# Altium PCB PCB2_layout.PcbDoc
Units mm, origin at the board's own origin, x right, y up, seen from the top; angles counter-clockwise.
Board outline 80 x 80 mm, 2 copper layers (Top Layer, Bottom Layer), stack 1.671 mm thick; 9 components, 2 nets, 53 pads, 593 vias.
Unrouted connection lines stored in the file: 7.
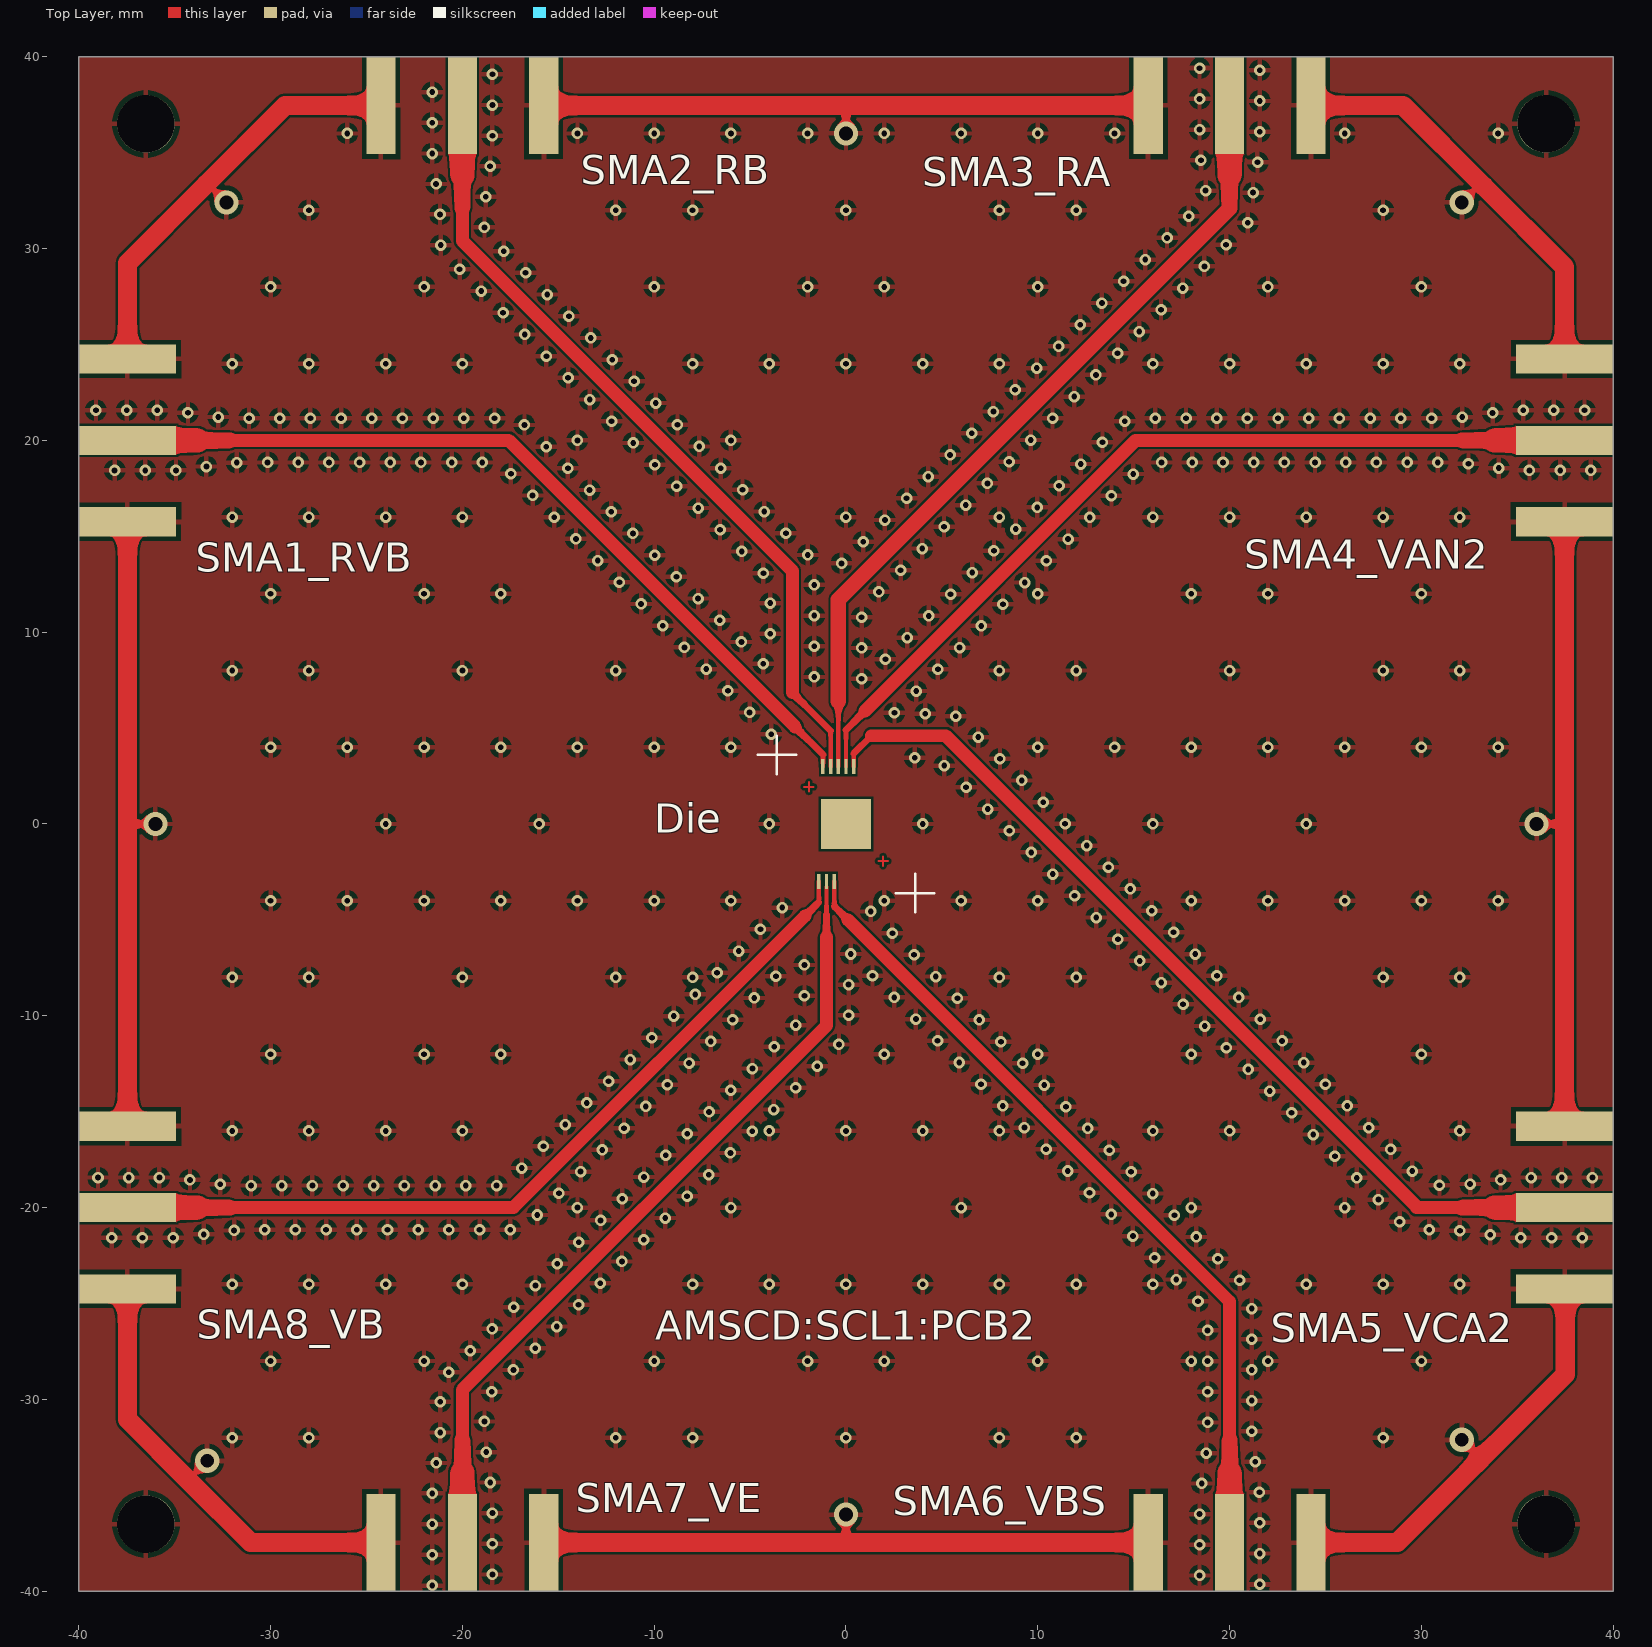
[diagram p0: Top Layer view]
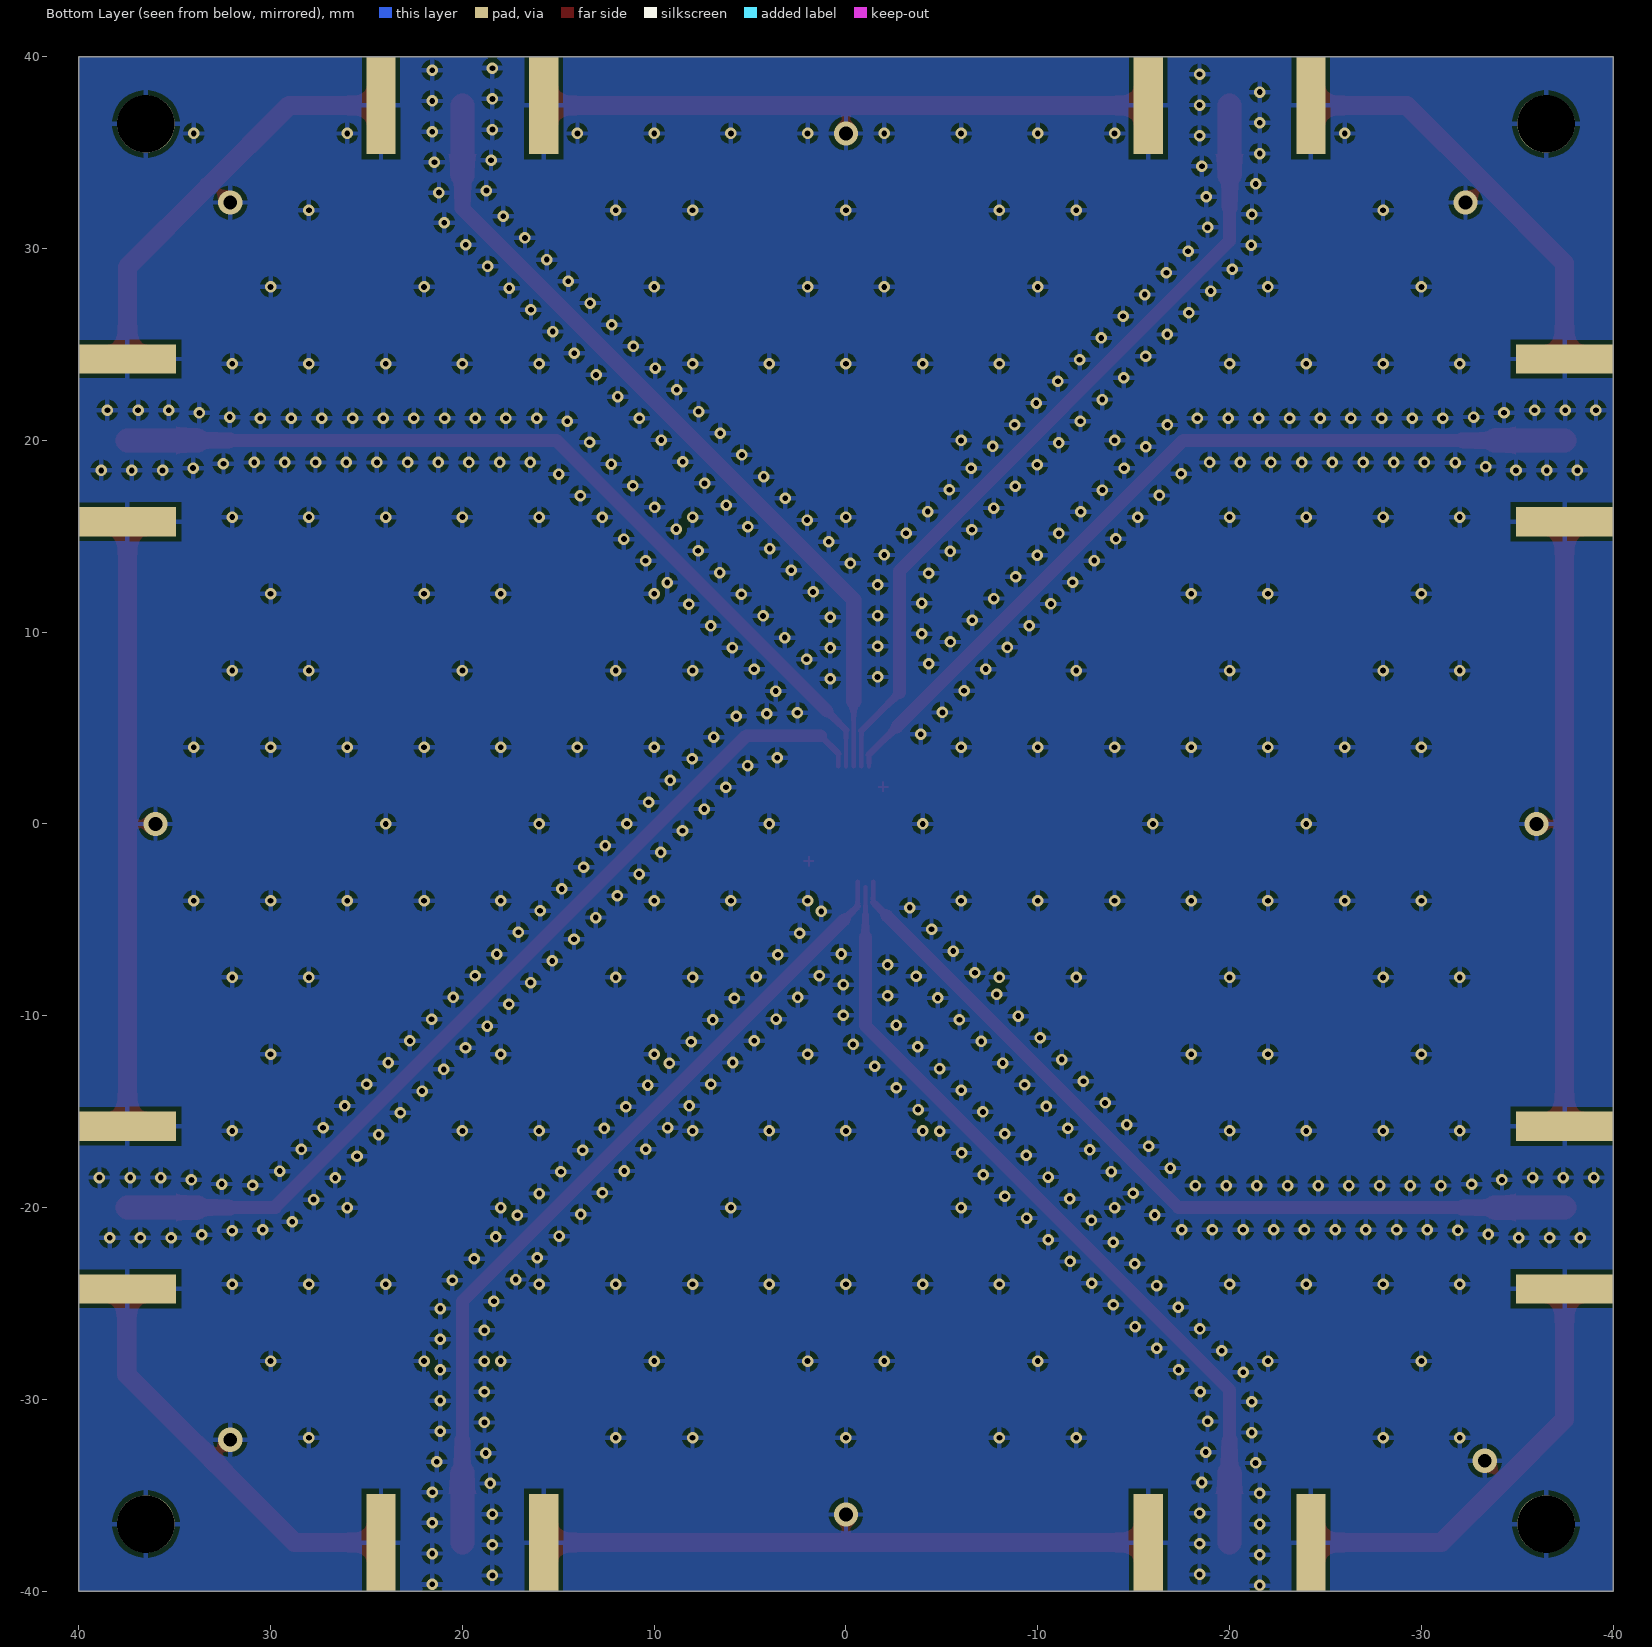
[diagram p1: Bottom Layer view, seen from below]
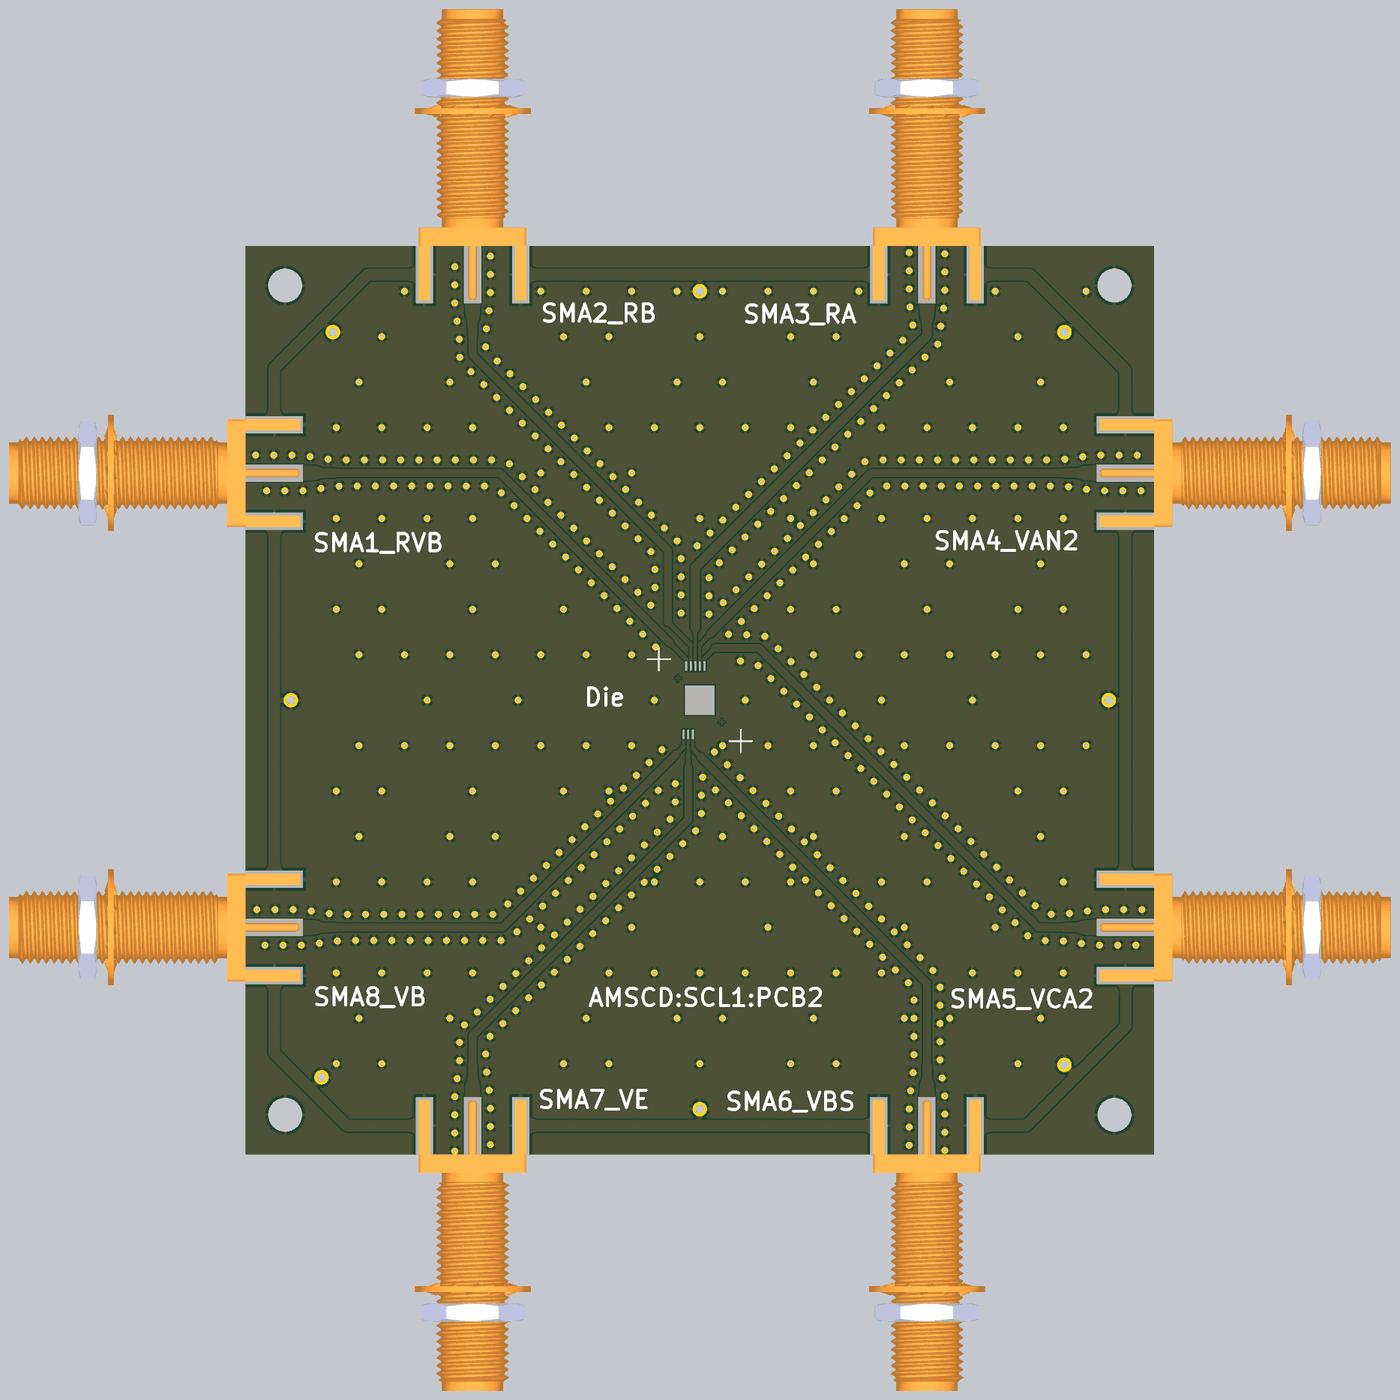
[diagram p2: 3D render of the assembled board from above, using the file's embedded part models]

## Layer stack, top to bottom
Top Solder: solder mask 0.0102, Solder Resist, Dk 3.5
Top Layer: signal copper 0.0356
Dielectric 1: dielectric 1.6, FR-4, Dk 4.5
Bottom Layer: signal copper 0.0356
Bottom Solder: solder mask 0.0102, Solder Resist, Dk 3.5

## Board outline
-40,-40 -40,40 40,40 40,-40

## Design rules (kind name [scope] priority, off if disabled: settings)
Clearance [All] p1: gap=0.127 ignorepadtopadclearanceinfootprint=FALSE except(0.1: Arc-Arc Arc-Track Track-Track)
HoleSize [All] p1: absolutevalues=TRUE maxlimit=3 minlimit=0.025 maxpercent=80.000 minpercent=20.000
MinimumSolderMaskSliver [All] p1: minsoldermaskwidth=0.05
PolygonConnect [All] p1: connectstyle=Relief reliefconductorwidth=0.254 reliefentries=4 polygonreliefangle="90 Angle" airgapwidth=0.254
RoutingVias [All] p1: holewidth=0.711 width=1.27 viastyle="Through Hole" minholewidth=0.711 minwidth=1.27 maxholewidth=0.711 maxwidth=1.27
SilkToSilkClearance [All] p1: silktosilkclearance=0.1
SilkToSolderMaskClearance [IsPad] p1: minsilkscreentomaskgap=0.1 clearancetoexposedcopper=TRUE
SolderMaskExpansion [All] p1: expansion=0 istentingtop=FALSE
UnRoutedNet [All] p1 off:
Width [All] p1: maxlimit=1.5 minlimit=0.1 preferedwidth=0.675 impedanceprofiledriven=TRUE impedanceprofileid={B1FB9A43-210C-48CF-8ADB-6F02EE692C1B} impedanceprofilevalue=50.000000 minimp=50.000000 maximp=50.000000 favimp=50.000000
25 further rules are at their usual default settings.

## Components (designator, comment, footprint, x,y, rotation, side; value= is the part's Value field where it differs from the comment)
Die "Comment" COB2_7x7 0,0 r0 top
SMA1_RVB "Comment" TE_CONSMA003.062-L-G#1 -40,20 r270 top
SMA2_RB "Comment" TE_CONSMA003.062-L-G#2 -20,40 r180 top
SMA3_RA "Comment" TE_CONSMA003.062-L-G#3 20,40 r180 top
SMA4_VAN2 "Comment" TE_CONSMA003.062-L-G#4 40,20 r90 top
SMA5_VCA2 "Comment" TE_CONSMA003.062-L-G#5 40,-20 r90 top
SMA6_VBS "Comment" TE_CONSMA003.062-L-G#6 20,-40 r0 top
SMA7_VE "Comment" TE_CONSMA003.062-L-G#7 -20,-40 r0 top
SMA8_VB "Comment" TE_CONSMA003.062-L-G#8 -40,-20 r270 top

## Footprints (in the part's own frame and the unit in brackets; to place one, negate y for a bottom-side part, rotate by r counter-clockwise, add the part's x,y. Pads: shape width x height; smd on the part's side, far side on the other; paste and mask are expansions set on the pad)
COB2_7x7 [mm]
  rect 2.6x2.6 smd: 9(0,0)
  rect 0.18x0.8 smd: SMA1_VB(-1.2,3) SMA2_RB(-0.8,3) SMA3_RA(-0.4,3) SMA4_VAN2(0,3) SMA5_VCA2(0.4,3) SMA6_VBS(-0.616,-3) SMA7_VE(-1.016,-3) SMA8_VB(-1.416,-3)
  silkscreen extent -4.6,-4.6 4.6,4.6
TE_CONSMA003.062-L-G#1 [mm]
  rect 1.52x5.08 smd far side: 4(-4.24,2.54) 5(4.24,2.54)
  rect 1.52x5.08 smd: GND(-4.24,2.54) GND(4.24,2.54) SMA1_VB(0,2.54)
  body extent -5.1,-20.8 5.1,4.8, height 5.5
TE_CONSMA003.062-L-G#2 [mm]
  rect 1.52x5.08 smd far side: 4(-4.24,2.54) 5(4.24,2.54)
  rect 1.52x5.08 smd: GND(-4.24,2.54) GND(4.24,2.54) SMA2_RB(0,2.54)
  body extent -5.1,-20.8 5.1,4.8, height 5.5
TE_CONSMA003.062-L-G#3 [mm]
  rect 1.52x5.08 smd far side: 4(-4.24,2.54) 5(4.24,2.54)
  rect 1.52x5.08 smd: GND(-4.24,2.54) GND(4.24,2.54) SMA3_RA(0,2.54)
  body extent -5.1,-20.8 5.1,4.8, height 5.5
TE_CONSMA003.062-L-G#4 [mm]
  rect 1.52x5.08 smd far side: 4(-4.24,2.54) 5(4.24,2.54)
  rect 1.52x5.08 smd: GND(-4.24,2.54) GND(4.24,2.54) SMA4_VAN2(0,2.54)
  body extent -5.1,-20.8 5.1,4.8, height 5.5
TE_CONSMA003.062-L-G#5 [mm]
  rect 1.52x5.08 smd far side: 4(-4.24,2.54) 5(4.24,2.54)
  rect 1.52x5.08 smd: GND(-4.24,2.54) GND(4.24,2.54) SMA5_VCA2(0,2.54)
  body extent -5.1,-20.8 5.1,4.8, height 5.5
TE_CONSMA003.062-L-G#6 [mm]
  rect 1.52x5.08 smd far side: 4(-4.24,2.54) 5(4.24,2.54)
  rect 1.52x5.08 smd: GND(-4.24,2.54) GND(4.24,2.54) SMA6_VBS(0,2.54)
  body extent -5.1,-20.8 5.1,4.8, height 5.5
TE_CONSMA003.062-L-G#7 [mm]
  rect 1.52x5.08 smd far side: 4(-4.24,2.54) 5(4.24,2.54)
  rect 1.52x5.08 smd: GND(-4.24,2.54) GND(4.24,2.54) SMA7_VE(0,2.54)
  body extent -5.1,-20.8 5.1,4.8, height 5.5
TE_CONSMA003.062-L-G#8 [mm]
  rect 1.52x5.08 smd far side: 4(-4.24,2.54) 5(4.24,2.54)
  rect 1.52x5.08 smd: GND(-4.24,2.54) GND(4.24,2.54) SMA8_VB(0,2.54)
  body extent -5.1,-20.8 5.1,4.8, height 5.5

## Free pads (board coordinates)
  round 3 hole 3 unplated: 2(-36.5,-36.5) 2(-36.5,36.5) 2(36.5,-36.5) 2(36.5,36.5)

## Via types
v1: diameter 0.6, hole 0.3, Top Layer to Bottom Layer, 585 vias
v2: diameter 1.27, hole 0.711, Top Layer to Bottom Layer, 8 vias

## Nets (pads, with @x,y where several pads share a name; then routed paths per layer and width w, separated by ;. In a path a pad name is that pad's centre, name@x,y a point inside that pad or via, vN(x,y) a via of type N, cw(c..) or ccw(c..) an arc to the next point about the centre after c; other vN are vias at no path point)
GND: pad.2 SMA1_RVB.4 SMA1_RVB.5 SMA1_RVB.GND SMA2_RB.4 SMA2_RB.5 SMA2_RB.GND SMA3_RA.4 SMA3_RA.5 SMA3_RA.GND SMA4_VAN2.4 SMA4_VAN2.5 SMA4_VAN2.GND SMA5_VCA2.4 SMA5_VCA2.5 SMA5_VCA2.GND SMA6_VBS.4 SMA6_VBS.5 SMA6_VBS.GND SMA7_VE.4 SMA7_VE.5 SMA7_VE.GND SMA8_VB.4 SMA8_VB.5 SMA8_VB.GND | length 224.9
  Top Layer w0.22: SMA5_VCA2.GND@37.46,-24.24 SMA5_VCA2.GND@37.5,-24.28
  Top Layer w0.254: -37.46,0 v2(-36,0) ; -34.25,-34.25 -34.25,-34.15 v2(-33.3,-33.2) ; -33.35,33.35 -33.25,33.35 v2(-32.3,32.4) ; 0,-37.46 v2(0,-36) ; v2(0,36) 0,37.46 ; v2(32.1,-32.1) 32.14,-32.1 33.12,-33.08 ; v2(32.1,32.4) 32.95,33.25 33.25,33.25 ; v2(36,0) 37.46,0
  Top Layer w1: SMA8_VB.GND@-37.46,-24.24 -37.46,-31.04 -34.25,-34.25 -31.04,-37.46 SMA7_VE.GND@-24.24,-37.46 ; SMA8_VB.GND@-37.46,-15.76 -37.46,0 SMA1_RVB.GND@-37.46,15.76 ; SMA1_RVB.GND@-37.46,24.24 -37.46,29.24 -33.35,33.35 -29.24,37.46 SMA2_RB.GND@-24.24,37.46 ; SMA7_VE.GND@-15.76,-37.46 0,-37.46 SMA6_VBS.GND@15.76,-37.46 ; SMA2_RB.GND@-15.76,37.46 0,37.46 SMA3_RA.GND@15.76,37.46 ; SMA6_VBS.GND@24.24,-37.46 28.74,-37.46 33.12,-33.08 37.5,-28.7 SMA5_VCA2.GND@37.5,-24.28 ; SMA3_RA.GND@24.24,37.46 29.04,37.46 33.25,33.25 37.46,29.04 SMA4_VAN2.GND@37.46,24.24 ; SMA5_VCA2.GND@37.46,-15.76 37.46,0 SMA4_VAN2.GND@37.46,15.76
  other v1: -21.567,-39.702 21.567,-39.637 18.433,-39.179 -18.433,-39.128 -21.567,-38.102 21.567,-38.037 18.433,-37.579 -18.433,-37.528 -21.567,-36.502 21.567,-36.437 18.433,-35.979 -18.433,-35.928 -21.564,-34.902 21.559,-34.837 18.553,-34.384 -18.545,-34.332 -21.356,-33.315 21.331,-33.253 18.781,-32.8 -18.761,-32.747 -32,-32 -28,-32 -12,-32 -8,-32 0,-32 8,-32 12,-32 28,-32 -21.151,-31.728 21.151,-31.663 18.849,-31.201 -18.849,-31.149 -21.151,-30.128 21.151,-30.063 18.849,-29.601 -18.468,-29.596 -20.716,-28.589 -17.337,-28.464 21.151,-28.463 -30,-28 -22,-28 -10,-28 -2,-28 2,-28 10,-28 18,-28 18.849,-28.001 22,-28 30,-28 -19.585,-27.457 -16.205,-27.333 21.151,-26.863 18.849,-26.401 -18.453,-26.326 -15.074,-26.201 21.151,-25.263 -17.322,-25.194 -13.942,-25.07 18.353,-24.88 -16.191,-24.063 -32,-24 -28,-24 -24,-24 -20,-24 -8,-24 -4,-24 0,-24 4,-24 8,-24 12,-24 16,-24 24,-24 28,-24 32,-24 -12.811,-23.939 20.52,-23.793 17.221,-23.749 -15.059,-22.932 -11.68,-22.807 19.389,-22.661 16.09,-22.618 -13.928,-21.8 -10.548,-21.676 -38.281,-21.567 -36.681,-21.567 -35.081,-21.567 35.186,-21.567 36.786,-21.567 38.386,-21.567 18.258,-21.53 14.959,-21.486 -33.49,-21.398 33.593,-21.419 -31.903,-21.191 32.007,-21.203 -30.303,-21.151 -28.703,-21.151 -27.103,-21.151 -25.503,-21.151 -23.903,-21.151 -22.303,-21.151 -20.703,-21.151 -19.103,-21.151 -17.503,-21.151 30.408,-21.16 28.864,-20.739 -12.797,-20.669 -9.417,-20.545 -16.098,-20.386 17.126,-20.399 13.827,-20.355 -14,-20 -6,-20 6,-20 18,-20 26,-20 27.757,-19.584 -11.665,-19.538 -8.286,-19.413 15.995,-19.267 -14.967,-19.254 12.696,-19.224 -31.019,-18.849 -29.419,-18.849 -27.819,-18.849 -26.219,-18.849 -24.619,-18.849 -23.019,-18.849 -21.419,-18.849 -19.819,-18.849 -18.219,-18.849 30.94,-18.84 -32.618,-18.784 32.539,-18.771 -34.201,-18.556 34.124,-18.556 26.625,-18.453 -38.997,-18.433 -37.397,-18.433 -35.797,-18.433 35.72,-18.433 37.32,-18.433 38.92,-18.433 -10.534,-18.406 -7.154,-18.282 -13.835,-18.123 14.864,-18.136 29.524,-18.096 11.565,-18.092 -16.905,-17.937 25.494,-17.321 -9.402,-17.275 -6.023,-17.15 13.732,-17.005 -12.704,-16.992 10.433,-16.961 28.392,-16.965 -15.773,-16.806 24.362,-16.19 -8.271,-16.144 -4.891,-16.019 -32,-16 -28,-16 -24,-16 -20,-16 -4,-16 0,-16 4,-16 8,-16 16,-16 20,-16 32,-16 -11.573,-15.86 12.601,-15.873 27.261,-15.833 9.302,-15.829 -14.642,-15.674 23.231,-15.059 -7.14,-15.012 -3.76,-14.888 11.469,-14.742 -10.441,-14.729 8.17,-14.698 26.129,-14.702 -13.511,-14.543 22.1,-13.927 -6.008,-13.881 -2.629,-13.756 -9.31,-13.598 10.338,-13.61 7.039,-13.567 24.998,-13.57 -12.379,-13.412 20.968,-12.796 -4.877,-12.749 -1.497,-12.625 9.207,-12.479 -8.179,-12.466 5.908,-12.435 23.867,-12.439 -11.248,-12.28 -30,-12 -22,-12 -18,-12 2,-12 10,-12 18,-12 30,-12 19.837,-11.665 -3.746,-11.618 -0.366,-11.494 8.075,-11.348 -7.047,-11.335 4.776,-11.304 22.735,-11.308 -10.116,-11.149 18.706,-10.533 -2.614,-10.487 -5.916,-10.203 6.944,-10.216 3.645,-10.173 21.604,-10.176 -8.985,-10.017 0.136,-9.974 17.574,-9.402 5.813,-9.085 -4.785,-9.072 2.514,-9.041 20.473,-9.045 -2.166,-8.951 -7.854,-8.886 0.136,-8.374 16.443,-8.27 -32,-8 -28,-8 -20,-8 -12,-8 -8,-8 8,-8 12,-8 28,-8 32,-8 -3.653,-7.941 4.681,-7.954 1.382,-7.91 19.341,-7.914 -6.722,-7.755 -2.166,-7.351 15.312,-7.139 3.55,-6.822 0.251,-6.778 18.21,-6.782 -5.591,-6.623 14.18,-6.008 2.418,-5.691 17.079,-5.651 -4.46,-5.492 13.049,-4.876 1.287,-4.56 15.947,-4.52 -3.328,-4.361 -30,-4 -26,-4 -22,-4 -18,-4 -14,-4 -10,-4 -6,-4 2,-4 6,-4 10,-4 18,-4 22,-4 26,-4 30,-4 34,-4 11.917,-3.745 14.816,-3.388 10.786,-2.614 13.684,-2.257 9.655,-1.482 12.553,-1.125 8.523,-0.351 -24,0 -16,0 -4,0 4,0 11.422,0.006 16,0 24,0 7.392,0.78 10.29,1.137 6.261,1.912 9.159,2.269 5.129,3.043 8.028,3.4 3.582,3.449 -30,4 -26,4 -22,4 -18,4 -14,4 -10,4 -6,4 10,4 14,4 18,4 22,4 26,4 30,4 34,4 6.896,4.531 -3.895,4.682 5.722,5.619 4.128,5.751 2.529,5.801 -5.026,5.814 -6.158,6.945 3.66,6.932 0.815,7.577 -1.649,7.664 -32,8 -28,8 -20,8 -12,8 8,8 12,8 20,8 28,8 32,8 4.791,8.064 -7.289,8.076 -4.317,8.359 2.057,8.585 0.815,9.177 -8.42,9.208 5.923,9.195 -1.649,9.264 -5.448,9.491 3.189,9.716 -3.951,9.917 7.054,10.327 -9.552,10.339 -6.58,10.622 0.815,10.777 4.32,10.848 -1.649,10.864 -10.683,11.47 8.186,11.458 -3.951,11.517 -7.711,11.754 5.451,11.979 -30,12 -22,12 -18,12 10,12 18,12 22,12 30,12 1.716,12.099 -1.649,12.464 9.317,12.589 -11.814,12.602 -8.842,12.885 -4.305,13.077 6.583,13.11 2.848,13.23 -0.234,13.584 -12.946,13.733 10.448,13.721 -9.974,14.016 -1.998,14.026 -5.436,14.209 7.714,14.242 3.979,14.361 0.898,14.716 -14.077,14.864 11.58,14.852 -11.105,15.148 -3.129,15.157 -6.568,15.34 8.845,15.373 5.111,15.493 2.029,15.847 12.711,15.983 -32,16 -28,16 -24,16 -20,16 -15.208,15.996 0,16 8,16 16,16 20,16 24,16 28,16 32,16 -12.236,16.279 -4.261,16.288 -7.699,16.471 9.977,16.504 6.242,16.624 3.161,16.979 -16.34,17.127 13.842,17.115 -13.368,17.41 -5.392,17.42 -8.83,17.603 11.108,17.636 7.373,17.755 4.292,18.11 14.974,18.246 -17.471,18.259 -38.132,18.433 -36.532,18.433 -34.932,18.433 35.633,18.433 37.233,18.433 38.833,18.433 -14.499,18.542 -6.524,18.551 34.038,18.556 -33.345,18.638 -9.962,18.734 12.24,18.767 32.455,18.785 -31.758,18.841 -30.158,18.849 -28.558,18.849 -26.958,18.849 -25.358,18.849 -23.758,18.849 -22.158,18.849 -20.558,18.849 -18.958,18.849 16.456,18.849 18.056,18.849 19.656,18.849 21.256,18.849 22.856,18.849 24.456,18.849 26.056,18.849 27.656,18.849 29.256,18.849 30.856,18.849 8.505,18.887 5.423,19.241 -15.63,19.673 -7.655,19.683 -11.093,19.866 13.371,19.899 -14,20 -6,20 9.636,20.018 6.555,20.373 -16.762,20.804 -8.786,20.814 -12.225,20.997 14.535,20.996 10.767,21.15 -31.124,21.151 -29.524,21.151 -27.924,21.151 -26.324,21.151 -24.724,21.151 -23.124,21.151 -21.524,21.151 -19.924,21.151 -18.324,21.151 16.128,21.151 17.728,21.151 19.328,21.151 20.928,21.151 22.528,21.151 24.128,21.151 25.728,21.151 27.328,21.151 28.928,21.151 30.528,21.151 -32.723,21.217 32.126,21.215 -34.306,21.444 33.711,21.433 7.686,21.504 -39.102,21.567 -37.502,21.567 -35.902,21.567 35.306,21.567 36.906,21.567 38.506,21.567 -9.918,21.945 -13.356,22.128 11.899,22.281 8.817,22.635 -11.049,23.077 -14.487,23.26 13.03,23.412 9.949,23.767 -32,24 -28,24 -24,24 -20,24 -8,24 -4,24 0,24 4,24 8,24 16,24 20,24 24,24 28,24 32,24 -12.18,24.208 -15.619,24.391 14.162,24.544 11.08,24.898 -13.312,25.339 -16.75,25.522 15.293,25.675 12.212,26.029 -14.443,26.471 -17.881,26.654 16.424,26.806 13.343,27.161 -15.575,27.602 -19.013,27.785 17.556,27.938 -30,28 -22,28 -10,28 -2,28 2,28 10,28 22,28 30,28 14.474,28.292 -16.706,28.733 -20.144,28.917 18.687,29.069 15.606,29.424 -17.837,29.865 -21.123,30.182 19.818,30.2 16.737,30.555 -18.849,31.104 20.94,31.341 17.868,31.686 -21.166,31.781 -28,32 -12,32 -8,32 0,32 8,32 12,32 28,32 -18.783,32.703 21.221,32.917 18.747,33.023 -21.37,33.368 -18.556,34.287 21.456,34.499 18.505,34.605 -21.567,34.956 -18.433,35.882 -26,36 -14,36 -10,36 -6,36 -2,36 2,36 6,36 10,36 14,36 26,36 34,36 21.567,36.095 18.433,36.203 -21.567,36.556 -18.433,37.482 21.567,37.695 18.433,37.803 -21.567,38.156 -18.433,39.082 21.567,39.295 18.433,39.403
SMA: Die.SMA1_VB Die.SMA2_RB Die.SMA3_RA Die.SMA4_VAN2 Die.SMA5_VCA2 Die.SMA6_VBS Die.SMA7_VE Die.SMA8_VB SMA1_RVB.SMA1_VB SMA2_RB.SMA2_RB SMA3_RA.SMA3_RA SMA4_VAN2.SMA4_VAN2 SMA5_VCA2.SMA5_VCA2 SMA6_VBS.SMA6_VBS SMA7_VE.SMA7_VE SMA8_VB.SMA8_VB | length 351.6
  Top Layer w0.22: -1.416,-4.076 Die.SMA8_VB ; Die.SMA1_VB -1.2,3.615 ; -1.015,-4.735 Die.SMA7_VE@-1.015,-3.29 ; Die.SMA2_RB -0.8,4.86 ; -0.616,-4.284 Die.SMA6_VBS ; Die.SMA3_RA -0.4,6.4 ; Die.SMA4_VAN2 0,4.9 ; Die.SMA5_VCA2 0.4,3.665
  Top Layer w0.35: -2.8,6.86 -0.8,4.86 ; -2.65,5.065 -1.2,3.615 ; -2.14,-4.8 -1.416,-4.076 ; -1.015,-5.901 -1.015,-4.735 ; -0.616,-4.284 0.1,-5 ; 0,4.9 1,5.9 ; 0.4,3.665 1.335,4.6
  Top Layer w0.675: -32.1,-20 -23.8,-20 -17.34,-20 -2.14,-4.8 ; -32.1,20 -17.585,20 -2.65,5.065 ; -20,-32.1 -20,-29.5 -1.015,-10.515 -1.015,-5.901 ; -20,32.1 -20,30.4 -2.8,13.2 -2.8,6.86 ; 0.1,-5 20,-24.9 20,-32.1 ; 1,5.9 15.1,20 32.1,20 ; 1.335,4.6 5.2,4.6 29.75,-19.95
  Top Layer w0.693: 29.75,-20 32.1,-20
  Top Layer w0.8: -33.8,-20 -32.1,-20 ; -33.8,20 -32.1,20 ; -20,-33.8 -20,-32.1 ; -20,32.1 -20,33.8 ; -0.4,6.4 -0.4,11.7 20,32.1 20,33.8 ; 20,-33.8 20,-32.1 ; 32.1,-20 33.8,-20 ; 32.1,20 33.8,20
  Top Layer w1.25: SMA8_VB.SMA8_VB -33.8,-20 ; SMA1_RVB.SMA1_VB -33.8,20 ; SMA7_VE.SMA7_VE -20,-33.8 ; -20,33.8 SMA2_RB.SMA2_RB ; SMA6_VBS.SMA6_VBS 20,-33.8 ; 20,33.8 SMA3_RA.SMA3_RA ; 33.8,-20 SMA5_VCA2.SMA5_VCA2 ; 33.8,20 SMA4_VAN2.SMA4_VAN2
pads on no net: Die.9
copper on no net: | length 2
  Top Layer w0.1: -2.183,1.933 -1.683,1.933 ; -1.933,1.683 -1.933,2.183 ; 1.683,-1.933 2.183,-1.933 ; 1.933,-2.183 1.933,-1.683

## Polygon pours and split planes (outlines as drawn)
GND on Bottom Layer "GND_L02_P001" (solid, pour order 1): -40,40 40,40 40,-40 -40,-40
GND on Top Layer "GND_L01_P003" (solid, pour order 3): -40,40 40,40 40,-40 -40,-40

## Silkscreen, mask and mechanical layers (free items; w line width, h text height)
Top Overlay:
  text "AMSCD:SCL1:PCB2" at -9.951,-26.901 h1.52
Mechanical 1:
  lines w0: 202.34,10.94 202.34,22.115